# Altium PCB A39C-T400A22S1a.pcbdoc
Units mm, origin at the board's own origin, x right, y up, seen from the top; angles counter-clockwise.
Board outline 51.98 x 43.2 mm, 2 copper layers (Top Layer, Bottom Layer); 1 components, 0 nets, 40 pads, 0 vias.
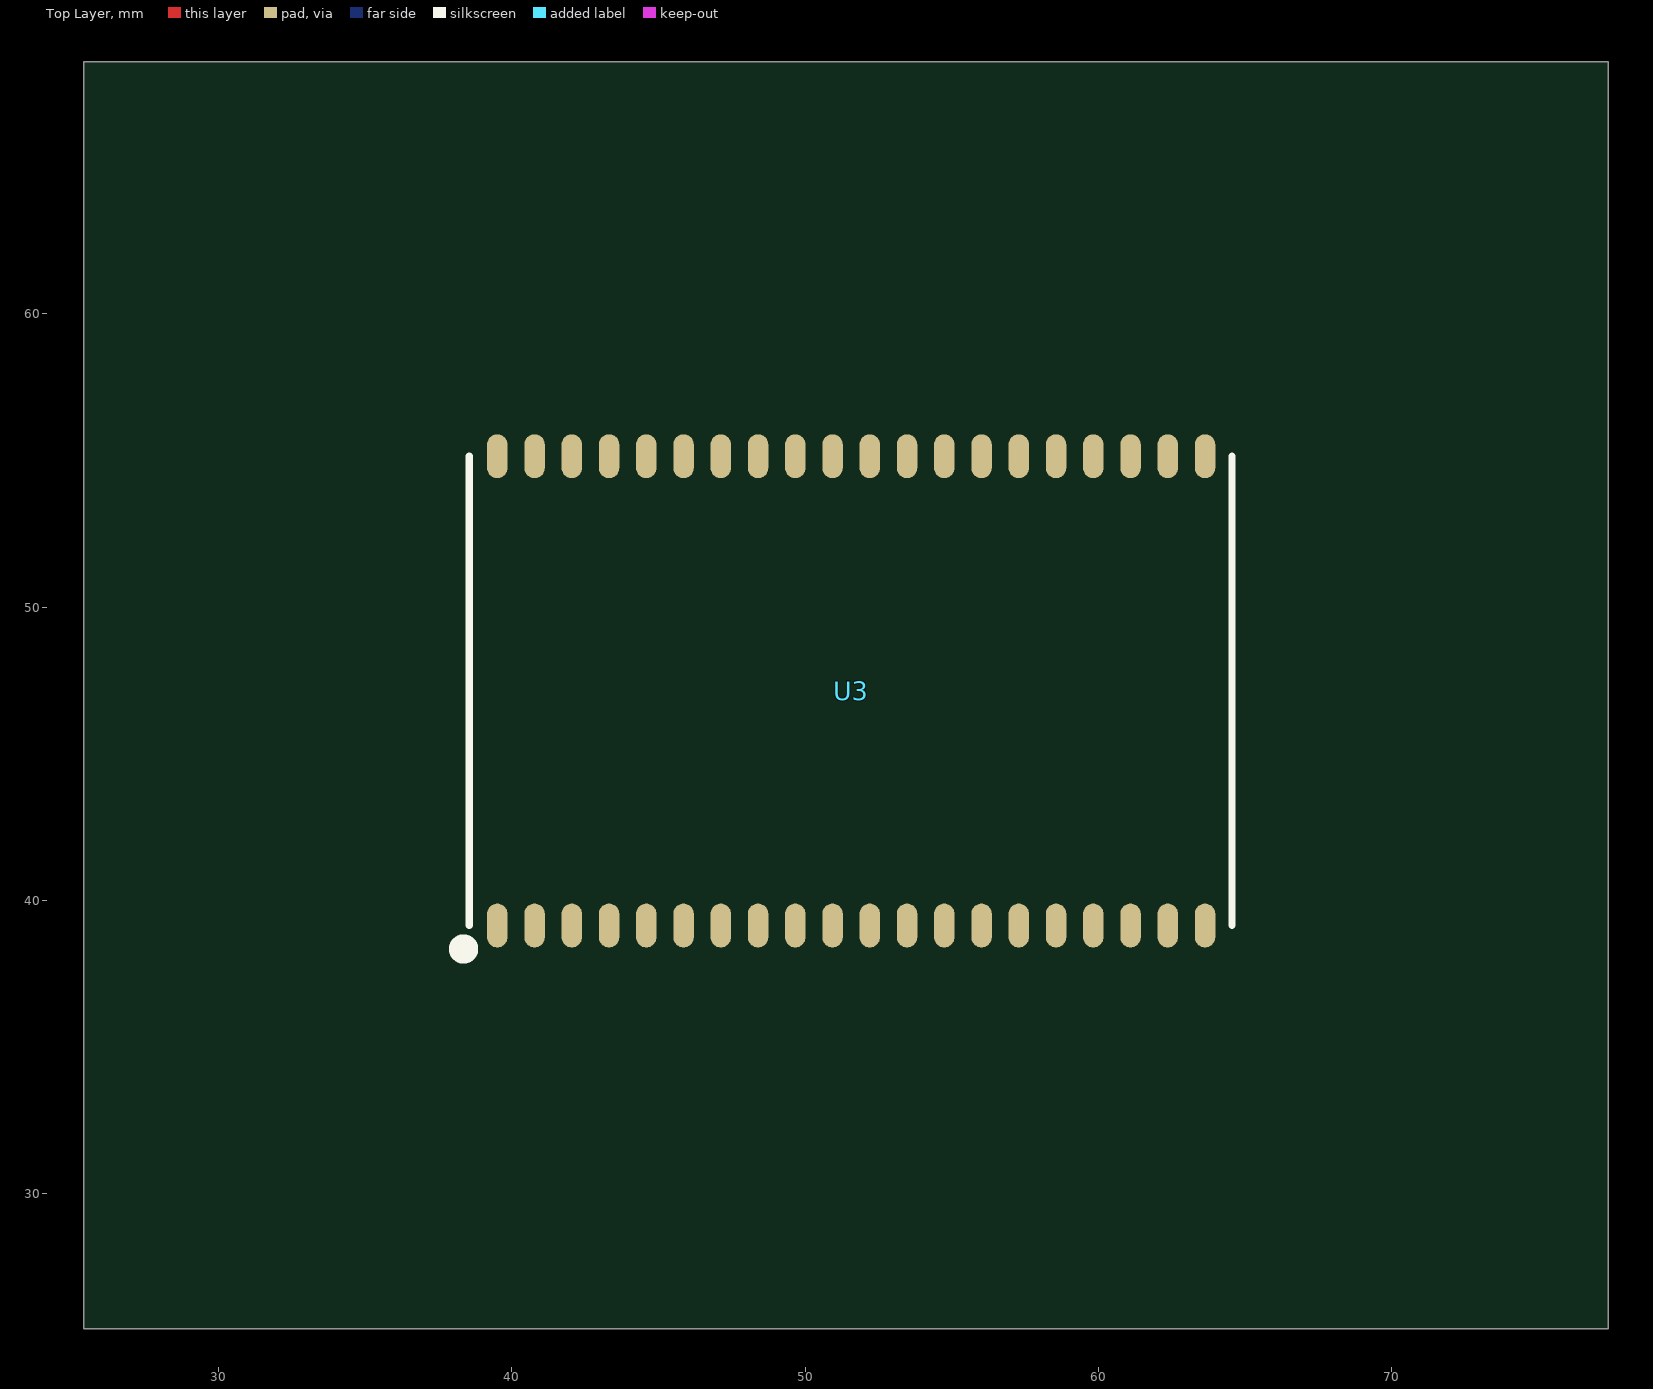
[diagram p0: Top Layer view]
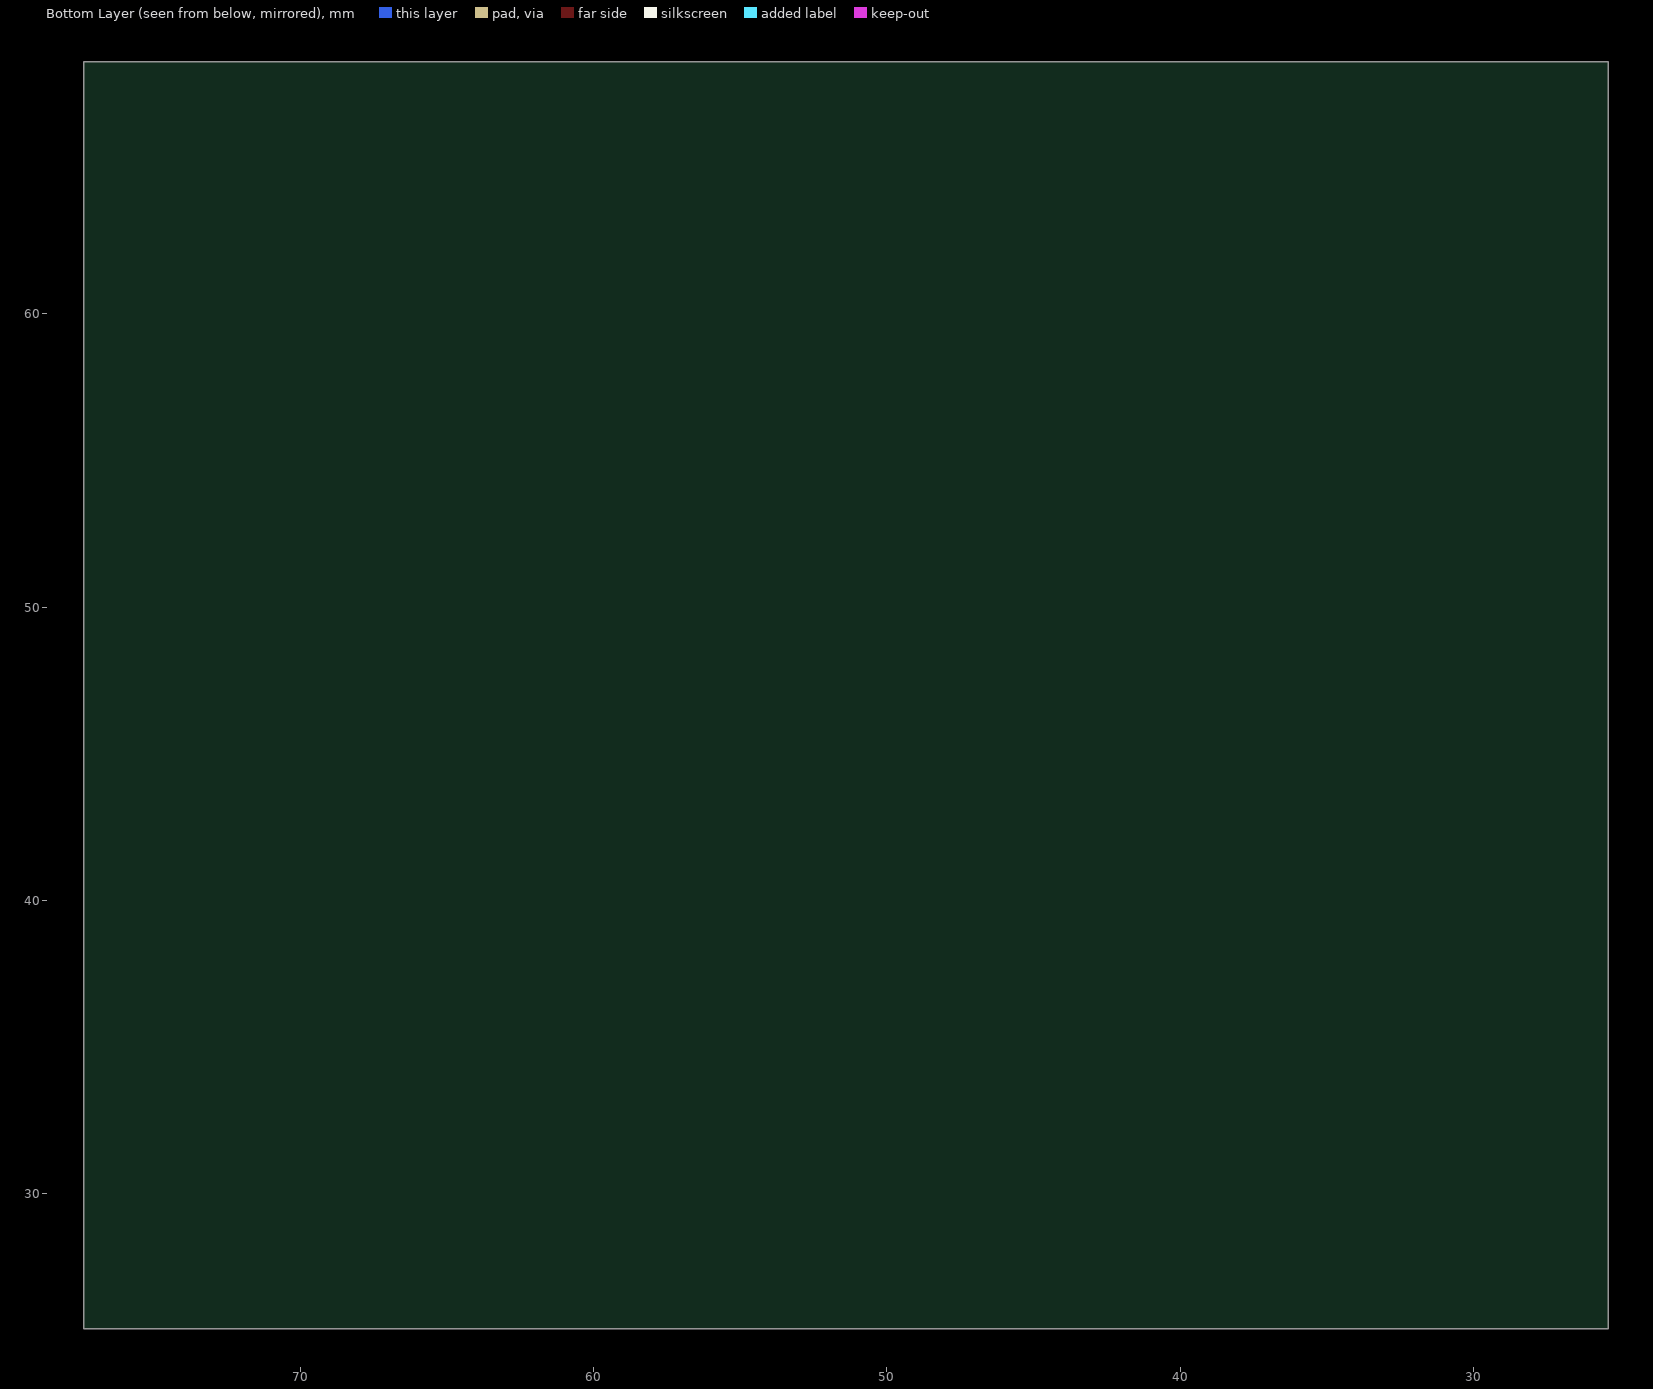
[diagram p1: Bottom Layer view, seen from below]

## Layer stack, top to bottom
Top Layer: signal copper (thickness not stored)
Dielectric: dielectric 0.32, FR-4, Dk 4.8
Bottom Layer: signal copper (thickness not stored)

## Board outline
77.377,25.4 25.4,25.4 25.4,68.6 77.377,68.6

## Components (designator, comment, footprint, x,y, rotation, side; value= is the part's Value field where it differs from the comment)
U3 "S26-PAD" S26-PAD 38.55,39.15 r0 top

## Footprints (in the part's own frame and the unit in brackets; to place one, negate y for a bottom-side part, rotate by r counter-clockwise, add the part's x,y. Pads: shape width x height; smd on the part's side, far side on the other; paste and mask are expansions set on the pad)
S26-PAD [mm]
  oval 0.7x1.5 smd: 1(0.95,0) 2(2.22,0) 3(3.49,0) 4(4.76,0) 5(6.03,0) 6(7.3,0) 7(8.57,0) 8(9.84,0) 9(11.11,0) 10(12.38,0) 11(13.65,0) 12(14.92,0) 13(16.19,0) 14(17.46,0) 15(18.73,0) 16(20,0) 17(21.27,0) 18(22.54,0) 19(23.81,0) 20(25.08,0) 21(25.08,16) 22(23.81,16) 23(22.54,16) 24(21.27,16) 25(20,16) 26(18.73,16) 27(17.46,16) 28(16.19,16) 29(14.92,16) 30(13.65,16) 31(12.38,16) 32(11.11,16) 33(9.84,16) 34(8.57,16) 35(7.3,16) 36(6.03,16) 37(4.76,16) 38(3.49,16) 39(2.22,16) 40(0.95,16)
  silkscreen extent -0.45,-1.05 26,16

## Nets (pads, with @x,y where several pads share a name; then routed paths per layer and width w, separated by ;. In a path a pad name is that pad's centre, name@x,y a point inside that pad or via, vN(x,y) a via of type N, cw(c..) or ccw(c..) an arc to the next point about the centre after c; other vN are vias at no path point)
pads on no net: U3.1 U3.2 U3.3 U3.4 U3.5 U3.6 U3.7 U3.8 U3.9 U3.10 U3.11 U3.12 U3.13 U3.14 U3.15 U3.16 U3.17 U3.18 U3.19 U3.20 U3.21 U3.22 U3.23 U3.24 U3.25 U3.26 U3.27 U3.28 U3.29 U3.30 U3.31 U3.32 U3.33 U3.34 U3.35 U3.36 U3.37 U3.38 U3.39 U3.40

## Silkscreen, mask and mechanical layers (free items; w line width, h text height)
Document:
  lines w0.003: 51.363,46.975 51.414,47.025